# EAGLE board caplocker_tiled (EAGLE 4.16)
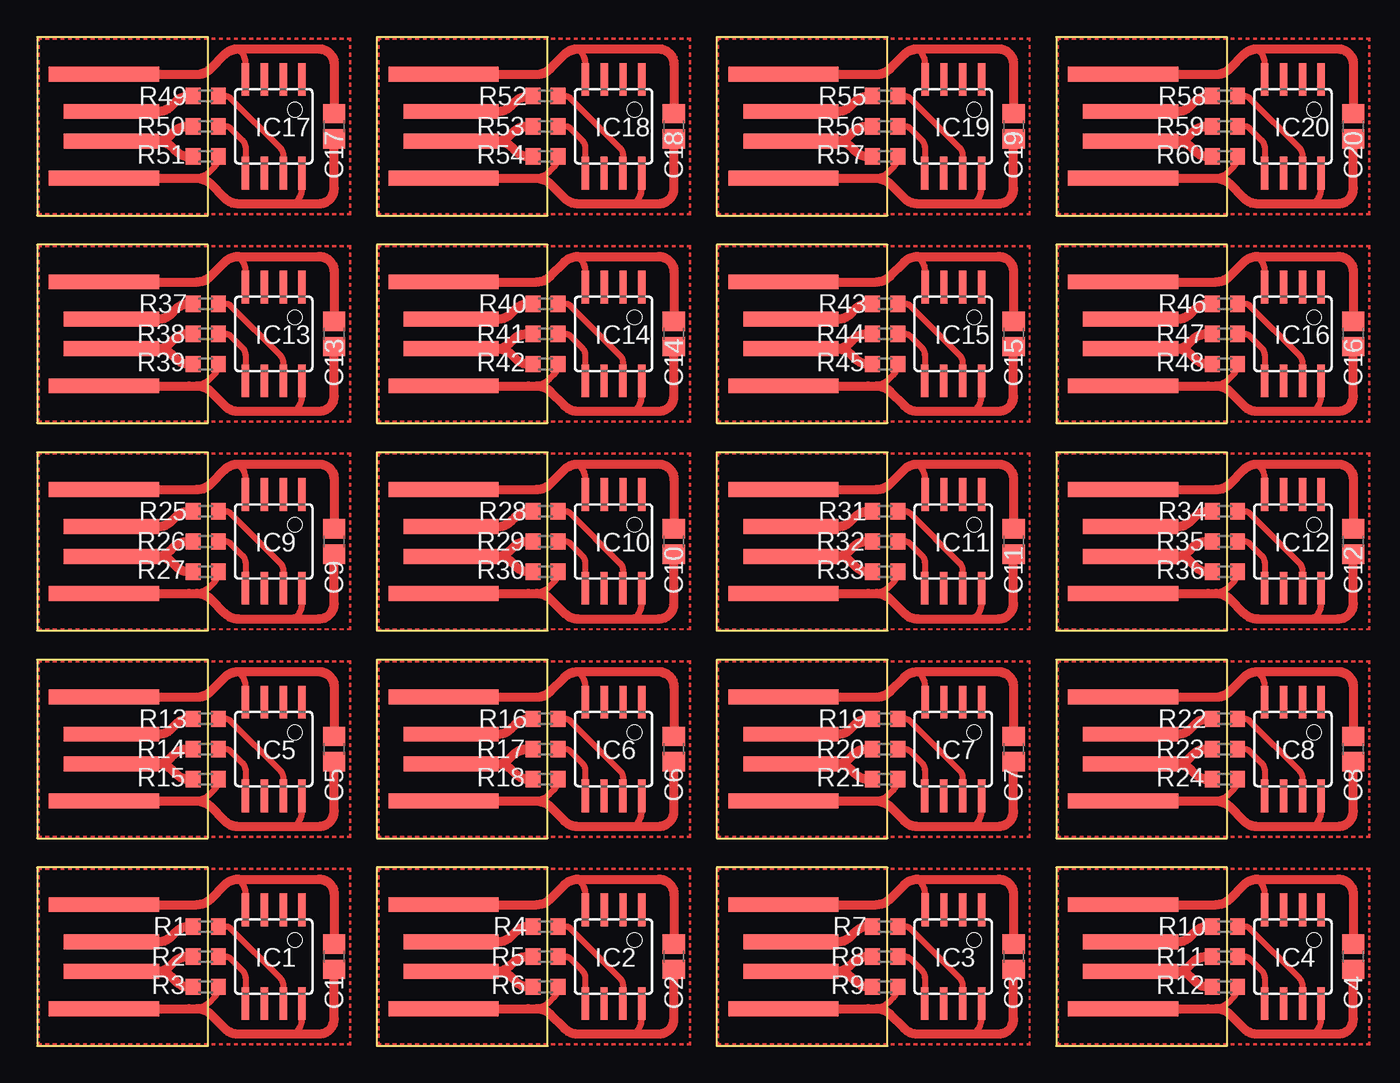
[diagram p0: board, top side]

Size 80.08 x 67.88 mm. Coordinates in mm from the lower left corner, seen from the top.
Copper layers (1*16): Top 0.035mm / dielectric 1.5mm / Bottom 0.035mm
Design rules "default": minimum track width 10mil, minimum drill 24mil, track to track 8mil, track to pad 8mil, pad to pad 8mil, via to via 8mil, smd to smd 8mil, copper to edge 40mil, drill to drill 8mil, minimum pad ring 10mil, minimum via ring 8mil, stop-mask expansion 4mil, vias tented up to drill 0mil, thermal gap 10mil

## Footprints (pad centres in the part's own frame; a part is rotated, then mirrored left to right if it is on the bottom)
C0805 = smd 1.3 x 1.5: 1 -0.85,0; 2 0.85,0
SOIC8 = smd 0.5 x 2.2: 1 -1.905,-3.154; 2 -0.645,-3.154; 3 0.625,-3.154; 4 1.895,-3.154; 5 1.905,3.154; 6 0.635,3.154; 7 -0.635,3.154; 8 -1.905,3.154
R0603 = smd 1 x 1.1: 1 -0.85,0; 2 0.85,0
USB_A_EDGE = smd 6.41 x 1: P$1 0,1; P$2 0,-1 | smd 7.41 x 1: P$3 -0.5,3.5; P$4 -0.5,-3.5

## Placement (x,y rotation side)
C1  0.1  [C0805]  19.99,6 90 top
C2  0.1  [C0805]  42.85,6 90 top
C3  0.1  [C0805]  65.71,6 90 top
C4  0.1  [C0805]  88.57,6 90 top  (outside the outline)
C5  0.1  [C0805]  19.99,19.97 90 top
C6  0.1  [C0805]  42.85,19.97 90 top
C7  0.1  [C0805]  65.71,19.97 90 top
C8  0.1  [C0805]  88.57,19.97 90 top  (outside the outline)
C9  0.1  [C0805]  19.99,33.94 90 top
C10  0.1  [C0805]  42.85,33.94 90 top
C11  0.1  [C0805]  65.71,33.94 90 top
C12  0.1  [C0805]  88.57,33.94 90 top  (outside the outline)
C13  0.1  [C0805]  19.99,47.91 90 top
C14  0.1  [C0805]  42.85,47.91 90 top
C15  0.1  [C0805]  65.71,47.91 90 top
C16  0.1  [C0805]  88.57,47.91 90 top  (outside the outline)
C17  0.1  [C0805]  19.99,61.88 90 top
C18  0.1  [C0805]  42.85,61.88 90 top
C19  0.1  [C0805]  65.71,61.88 90 top
C20  0.1  [C0805]  88.57,61.88 90 top  (outside the outline)
IC1  TINY45  [SOIC8]  15.92,6 180 top
IC2  TINY45  [SOIC8]  38.78,6 180 top
IC3  TINY45  [SOIC8]  61.64,6 180 top
IC4  TINY45  [SOIC8]  84.5,6 180 top
IC5  TINY45  [SOIC8]  15.92,19.97 180 top
IC6  TINY45  [SOIC8]  38.78,19.97 180 top
IC7  TINY45  [SOIC8]  61.64,19.97 180 top
IC8  TINY45  [SOIC8]  84.5,19.97 180 top
IC9  TINY45  [SOIC8]  15.92,33.94 180 top
IC10  TINY45  [SOIC8]  38.78,33.94 180 top
IC11  TINY45  [SOIC8]  61.64,33.94 180 top
IC12  TINY45  [SOIC8]  84.5,33.94 180 top
IC13  TINY45  [SOIC8]  15.92,47.91 180 top
IC14  TINY45  [SOIC8]  38.78,47.91 180 top
IC15  TINY45  [SOIC8]  61.64,47.91 180 top
IC16  TINY45  [SOIC8]  84.5,47.91 180 top
IC17  TINY45  [SOIC8]  15.92,61.88 180 top
IC18  TINY45  [SOIC8]  38.78,61.88 180 top
IC19  TINY45  [SOIC8]  61.64,61.88 180 top
IC20  TINY45  [SOIC8]  84.5,61.88 180 top
R1  68  [R0603]  11.35,8.03 180 top
R2  68  [R0603]  11.35,6 180 top
R3  2K  [R0603]  11.35,3.97 180 top
R4  68  [R0603]  34.21,8.03 180 top
R5  68  [R0603]  34.21,6 180 top
R6  2K  [R0603]  34.21,3.97 180 top
R7  68  [R0603]  57.07,8.03 180 top
R8  68  [R0603]  57.07,6 180 top
R9  2K  [R0603]  57.07,3.97 180 top
R10  68  [R0603]  79.93,8.03 180 top
R11  68  [R0603]  79.93,6 180 top
R12  2K  [R0603]  79.93,3.97 180 top
R13  68  [R0603]  11.35,22 180 top
R14  68  [R0603]  11.35,19.97 180 top
R15  2K  [R0603]  11.35,17.94 180 top
R16  68  [R0603]  34.21,22 180 top
R17  68  [R0603]  34.21,19.97 180 top
R18  2K  [R0603]  34.21,17.94 180 top
R19  68  [R0603]  57.07,22 180 top
R20  68  [R0603]  57.07,19.97 180 top
R21  2K  [R0603]  57.07,17.94 180 top
R22  68  [R0603]  79.93,22 180 top
R23  68  [R0603]  79.93,19.97 180 top
R24  2K  [R0603]  79.93,17.94 180 top
R25  68  [R0603]  11.35,35.97 180 top
R26  68  [R0603]  11.35,33.94 180 top
R27  2K  [R0603]  11.35,31.91 180 top
R28  68  [R0603]  34.21,35.97 180 top
R29  68  [R0603]  34.21,33.94 180 top
R30  2K  [R0603]  34.21,31.91 180 top
R31  68  [R0603]  57.07,35.97 180 top
R32  68  [R0603]  57.07,33.94 180 top
R33  2K  [R0603]  57.07,31.91 180 top
R34  68  [R0603]  79.93,35.97 180 top
R35  68  [R0603]  79.93,33.94 180 top
R36  2K  [R0603]  79.93,31.91 180 top
R37  68  [R0603]  11.35,49.94 180 top
R38  68  [R0603]  11.35,47.91 180 top
R39  2K  [R0603]  11.35,45.88 180 top
R40  68  [R0603]  34.21,49.94 180 top
R41  68  [R0603]  34.21,47.91 180 top
R42  2K  [R0603]  34.21,45.88 180 top
R43  68  [R0603]  57.07,49.94 180 top
R44  68  [R0603]  57.07,47.91 180 top
R45  2K  [R0603]  57.07,45.88 180 top
R46  68  [R0603]  79.93,49.94 180 top
R47  68  [R0603]  79.93,47.91 180 top
R48  2K  [R0603]  79.93,45.88 180 top
R49  68  [R0603]  11.35,63.91 180 top
R50  68  [R0603]  11.35,61.88 180 top
R51  2K  [R0603]  11.35,59.85 180 top
R52  68  [R0603]  34.21,63.91 180 top
R53  68  [R0603]  34.21,61.88 180 top
R54  2K  [R0603]  34.21,59.85 180 top
R55  68  [R0603]  57.07,63.91 180 top
R56  68  [R0603]  57.07,61.88 180 top
R57  2K  [R0603]  57.07,59.85 180 top
R58  68  [R0603]  79.93,63.91 180 top
R59  68  [R0603]  79.93,61.88 180 top
R60  2K  [R0603]  79.93,59.85 180 top
U$1  USB_A_EDGE  [USB_A_EDGE]  5,6 0 top
U$2  USB_A_EDGE  [USB_A_EDGE]  27.86,6 0 top
U$3  USB_A_EDGE  [USB_A_EDGE]  50.72,6 0 top
U$4  USB_A_EDGE  [USB_A_EDGE]  73.58,6 0 top
U$5  USB_A_EDGE  [USB_A_EDGE]  5,19.97 0 top
U$6  USB_A_EDGE  [USB_A_EDGE]  27.86,19.97 0 top
U$7  USB_A_EDGE  [USB_A_EDGE]  50.72,19.97 0 top
U$8  USB_A_EDGE  [USB_A_EDGE]  73.58,19.97 0 top
U$9  USB_A_EDGE  [USB_A_EDGE]  5,33.94 0 top
U$10  USB_A_EDGE  [USB_A_EDGE]  27.86,33.94 0 top
U$11  USB_A_EDGE  [USB_A_EDGE]  50.72,33.94 0 top
U$12  USB_A_EDGE  [USB_A_EDGE]  73.58,33.94 0 top
U$13  USB_A_EDGE  [USB_A_EDGE]  5,47.91 0 top
U$14  USB_A_EDGE  [USB_A_EDGE]  27.86,47.91 0 top
U$15  USB_A_EDGE  [USB_A_EDGE]  50.72,47.91 0 top
U$16  USB_A_EDGE  [USB_A_EDGE]  73.58,47.91 0 top
U$17  USB_A_EDGE  [USB_A_EDGE]  5,61.88 0 top
U$18  USB_A_EDGE  [USB_A_EDGE]  27.86,61.88 0 top
U$19  USB_A_EDGE  [USB_A_EDGE]  50.72,61.88 0 top
U$20  USB_A_EDGE  [USB_A_EDGE]  73.58,61.88 0 top

## Library data of the parts
C1-C20 R1-R60 = rcl
IC1-IC20 = avr-4
U$1-U$20 = macetech

## Nets
GND: C1.2 IC1.4 U$1.P$3
GND1: C2.2 IC2.4 U$2.P$3
GND2: C3.2 IC3.4 U$3.P$3
GND3: C4.2 IC4.4 U$4.P$3
GND4: C5.2 IC5.4 U$5.P$3
GND5: C6.2 IC6.4 U$6.P$3
GND6: C7.2 IC7.4 U$7.P$3
GND7: C8.2 IC8.4 U$8.P$3
GND8: C9.2 IC9.4 U$9.P$3
GND9: C10.2 IC10.4 U$10.P$3
GND10: C11.2 IC11.4 U$11.P$3
GND11: C12.2 IC12.4 U$12.P$3
GND12: C13.2 IC13.4 U$13.P$3
GND13: C14.2 IC14.4 U$14.P$3
GND14: C15.2 IC15.4 U$15.P$3
GND15: C16.2 IC16.4 U$16.P$3
GND16: C17.2 IC17.4 U$17.P$3
GND17: C18.2 IC18.4 U$18.P$3
GND18: C19.2 IC19.4 U$19.P$3
GND19: C20.2 IC20.4 U$20.P$3
N$1: C1.1 IC1.8 R3.1 U$1.P$4
N$2: R1.2 U$1.P$1
N$3: R2.2 R3.2 U$1.P$2
N$4: IC1.7 R1.1
N$5: IC1.5 R2.1
N$6: C2.1 IC2.8 R6.1 U$2.P$4
N$7: R4.2 U$2.P$1
N$8: R5.2 R6.2 U$2.P$2
N$9: IC2.7 R4.1
N$10: IC2.5 R5.1
N$11: C3.1 IC3.8 R9.1 U$3.P$4
N$12: R7.2 U$3.P$1
N$13: R8.2 R9.2 U$3.P$2
N$14: IC3.7 R7.1
N$15: IC3.5 R8.1
N$16: C4.1 IC4.8 R12.1 U$4.P$4
N$17: R10.2 U$4.P$1
N$18: R11.2 R12.2 U$4.P$2
N$19: IC4.7 R10.1
N$20: IC4.5 R11.1
N$21: C5.1 IC5.8 R15.1 U$5.P$4
N$22: R13.2 U$5.P$1
N$23: R14.2 R15.2 U$5.P$2
N$24: IC5.7 R13.1
N$25: IC5.5 R14.1
N$26: C6.1 IC6.8 R18.1 U$6.P$4
N$27: R16.2 U$6.P$1
N$28: R17.2 R18.2 U$6.P$2
N$29: IC6.7 R16.1
N$30: IC6.5 R17.1
N$31: C7.1 IC7.8 R21.1 U$7.P$4
N$32: R19.2 U$7.P$1
N$33: R20.2 R21.2 U$7.P$2
N$34: IC7.7 R19.1
N$35: IC7.5 R20.1
N$36: C8.1 IC8.8 R24.1 U$8.P$4
N$37: R22.2 U$8.P$1
N$38: R23.2 R24.2 U$8.P$2
N$39: IC8.7 R22.1
N$40: IC8.5 R23.1
N$41: C9.1 IC9.8 R27.1 U$9.P$4
N$42: R25.2 U$9.P$1
N$43: R26.2 R27.2 U$9.P$2
N$44: IC9.7 R25.1
N$45: IC9.5 R26.1
N$46: C10.1 IC10.8 R30.1 U$10.P$4
N$47: R28.2 U$10.P$1
N$48: R29.2 R30.2 U$10.P$2
N$49: IC10.7 R28.1
N$50: IC10.5 R29.1
N$51: C11.1 IC11.8 R33.1 U$11.P$4
N$52: R31.2 U$11.P$1
N$53: R32.2 R33.2 U$11.P$2
N$54: IC11.7 R31.1
N$55: IC11.5 R32.1
N$56: C12.1 IC12.8 R36.1 U$12.P$4
N$57: R34.2 U$12.P$1
N$58: R35.2 R36.2 U$12.P$2
N$59: IC12.7 R34.1
N$60: IC12.5 R35.1
N$61: C13.1 IC13.8 R39.1 U$13.P$4
N$62: R37.2 U$13.P$1
N$63: R38.2 R39.2 U$13.P$2
N$64: IC13.7 R37.1
N$65: IC13.5 R38.1
N$66: C14.1 IC14.8 R42.1 U$14.P$4
N$67: R40.2 U$14.P$1
N$68: R41.2 R42.2 U$14.P$2
N$69: IC14.7 R40.1
N$70: IC14.5 R41.1
N$71: C15.1 IC15.8 R45.1 U$15.P$4
N$72: R43.2 U$15.P$1
N$73: R44.2 R45.2 U$15.P$2
N$74: IC15.7 R43.1
N$75: IC15.5 R44.1
N$76: C16.1 IC16.8 R48.1 U$16.P$4
N$77: R46.2 U$16.P$1
N$78: R47.2 R48.2 U$16.P$2
N$79: IC16.7 R46.1
N$80: IC16.5 R47.1
N$81: C17.1 IC17.8 R51.1 U$17.P$4
N$82: R49.2 U$17.P$1
N$83: R50.2 R51.2 U$17.P$2
N$84: IC17.7 R49.1
N$85: IC17.5 R50.1
N$86: C18.1 IC18.8 R54.1 U$18.P$4
N$87: R52.2 U$18.P$1
N$88: R53.2 R54.2 U$18.P$2
N$89: IC18.7 R52.1
N$90: IC18.5 R53.1
N$91: C19.1 IC19.8 R57.1 U$19.P$4
N$92: R55.2 U$19.P$1
N$93: R56.2 R57.2 U$19.P$2
N$94: IC19.7 R55.1
N$95: IC19.5 R56.1
N$96: C20.1 IC20.8 R60.1 U$20.P$4
N$97: R58.2 U$20.P$1
N$98: R59.2 R60.2 U$20.P$2
N$99: IC20.7 R58.1
N$100: IC20.5 R59.1

## Tracks (layer width: path | path; a pad name or v marks a point on that pad's centre or on a via)
GND
  Top 0.406: IC1.4 IC1.4 arc-45 14.02,9.18 14.02,10.19 arc45 13.64,11.09 13.53,11.21
  Top 0.61: U$1.P$3 10.77,9.5 arc45 11.67,9.87 12.63,10.84 arc-45 13.53,11.21 18.97,11.21 arc-90 19.99,10.19 C1.2
GND1
  Top 0.406: IC2.4 IC2.4 arc-45 36.88,9.18 36.88,10.19 arc45 36.5,11.09 36.39,11.21
  Top 0.61: U$2.P$3 33.63,9.5 arc45 34.53,9.87 35.49,10.84 arc-45 36.39,11.21 41.83,11.21 arc-90 42.85,10.19 C2.2
GND2
  Top 0.406: IC3.4 IC3.4 arc-45 59.74,9.18 59.74,10.19 arc45 59.36,11.09 59.25,11.21
  Top 0.61: U$3.P$3 56.49,9.5 arc45 57.39,9.87 58.35,10.84 arc-45 59.25,11.21 64.69,11.21 arc-90 65.71,10.19 C3.2
GND3
  Top 0.406: IC4.4 IC4.4 arc-45 82.6,9.18 82.6,10.19 arc45 82.22,11.09 82.11,11.21
  Top 0.61: U$4.P$3 79.35,9.5 arc45 80.25,9.87 81.21,10.84 arc-45 82.11,11.21 87.55,11.21 arc-90 88.57,10.19 C4.2
GND4
  Top 0.406: IC5.4 IC5.4 arc-45 14.02,23.14 14.02,24.16 arc45 13.64,25.06 13.53,25.18
  Top 0.61: U$5.P$3 10.77,23.47 arc45 11.67,23.84 12.63,24.8 arc-45 13.53,25.18 18.97,25.18 arc-90 19.99,24.16 C5.2
GND5
  Top 0.406: IC6.4 IC6.4 arc-45 36.88,23.14 36.88,24.16 arc45 36.5,25.06 36.39,25.18
  Top 0.61: U$6.P$3 33.63,23.47 arc45 34.53,23.84 35.49,24.8 arc-45 36.39,25.18 41.83,25.18 arc-90 42.85,24.16 C6.2
GND6
  Top 0.406: IC7.4 IC7.4 arc-45 59.74,23.14 59.74,24.16 arc45 59.36,25.06 59.25,25.18
  Top 0.61: U$7.P$3 56.49,23.47 arc45 57.39,23.84 58.35,24.8 arc-45 59.25,25.18 64.69,25.18 arc-90 65.71,24.16 C7.2
GND7
  Top 0.406: IC8.4 IC8.4 arc-45 82.6,23.14 82.6,24.16 arc45 82.22,25.06 82.11,25.18
  Top 0.61: U$8.P$3 79.35,23.47 arc45 80.25,23.84 81.21,24.8 arc-45 82.11,25.18 87.55,25.18 arc-90 88.57,24.16 C8.2
GND8
  Top 0.406: IC9.4 IC9.4 arc-45 14.02,37.12 14.02,38.13 arc45 13.64,39.03 13.53,39.15
  Top 0.61: U$9.P$3 10.77,37.44 arc45 11.67,37.81 12.63,38.77 arc-45 13.53,39.15 18.97,39.15 arc-90 19.99,38.13 C9.2
GND9
  Top 0.406: IC10.4 IC10.4 arc-45 36.88,37.12 36.88,38.13 arc45 36.5,39.03 36.39,39.15
  Top 0.61: U$10.P$3 33.63,37.44 arc45 34.53,37.81 35.49,38.77 arc-45 36.39,39.15 41.83,39.15 arc-90 42.85,38.13 C10.2
GND10
  Top 0.406: IC11.4 IC11.4 arc-45 59.74,37.12 59.74,38.13 arc45 59.36,39.03 59.25,39.15
  Top 0.61: U$11.P$3 56.49,37.44 arc45 57.39,37.81 58.35,38.77 arc-45 59.25,39.15 64.69,39.15 arc-90 65.71,38.13 C11.2
GND11
  Top 0.406: IC12.4 IC12.4 arc-45 82.6,37.12 82.6,38.13 arc45 82.22,39.03 82.11,39.15
  Top 0.61: U$12.P$3 79.35,37.44 arc45 80.25,37.81 81.21,38.77 arc-45 82.11,39.15 87.55,39.15 arc-90 88.57,38.13 C12.2
GND12
  Top 0.406: IC13.4 IC13.4 arc-45 14.02,51.09 14.02,52.1 arc45 13.64,53 13.53,53.12
  Top 0.61: U$13.P$3 10.77,51.41 arc45 11.67,51.78 12.63,52.74 arc-45 13.53,53.12 18.97,53.12 arc-90 19.99,52.1 C13.2
GND13
  Top 0.406: IC14.4 IC14.4 arc-45 36.88,51.09 36.88,52.1 arc45 36.5,53 36.39,53.12
  Top 0.61: U$14.P$3 33.63,51.41 arc45 34.53,51.78 35.49,52.74 arc-45 36.39,53.12 41.83,53.12 arc-90 42.85,52.1 C14.2
GND14
  Top 0.406: IC15.4 IC15.4 arc-45 59.74,51.09 59.74,52.1 arc45 59.36,53 59.25,53.12
  Top 0.61: U$15.P$3 56.49,51.41 arc45 57.39,51.78 58.35,52.74 arc-45 59.25,53.12 64.69,53.12 arc-90 65.71,52.1 C15.2
GND15
  Top 0.406: IC16.4 IC16.4 arc-45 82.6,51.09 82.6,52.1 arc45 82.22,53 82.11,53.12
  Top 0.61: U$16.P$3 79.35,51.41 arc45 80.25,51.78 81.21,52.74 arc-45 82.11,53.12 87.55,53.12 arc-90 88.57,52.1 C16.2
GND16
  Top 0.406: IC17.4 IC17.4 arc-45 14.02,65.06 14.02,66.07 arc45 13.64,66.97 13.53,67.09
  Top 0.61: U$17.P$3 10.77,65.38 arc45 11.67,65.75 12.63,66.72 arc-45 13.53,67.09 18.97,67.09 arc-90 19.99,66.07 C17.2
GND17
  Top 0.406: IC18.4 IC18.4 arc-45 36.88,65.06 36.88,66.07 arc45 36.5,66.97 36.39,67.09
  Top 0.61: U$18.P$3 33.63,65.38 arc45 34.53,65.75 35.49,66.72 arc-45 36.39,67.09 41.83,67.09 arc-90 42.85,66.07 C18.2
GND18
  Top 0.406: IC19.4 IC19.4 arc-45 59.74,65.06 59.74,66.07 arc45 59.36,66.97 59.25,67.09
  Top 0.61: U$19.P$3 56.49,65.38 arc45 57.39,65.75 58.35,66.72 arc-45 59.25,67.09 64.69,67.09 arc-90 65.71,66.07 C19.2
GND19
  Top 0.406: IC20.4 IC20.4 arc-45 82.6,65.06 82.6,66.07 arc45 82.22,66.97 82.11,67.09
  Top 0.61: U$20.P$3 79.35,65.38 arc45 80.25,65.75 81.21,66.72 arc-45 82.11,67.09 87.55,67.09 arc-90 88.57,66.07 C20.2
N$1
  Top 0.406: IC1.8 17.83,1.83 arc-45 17.46,0.93 17.32,0.79 | R3.1 arc-45 11.9,3.25 11.59,2.94 arc-45 10.7,2.57 10.21,2.57 10.21,2.5
  Top 0.61: U$1.P$4 10.21,2.5 10.77,2.5 arc-45 11.67,2.13 12.63,1.16 arc45 13.53,0.79 17.32,0.79 18.97,0.79 arc90 19.99,1.81 C1.1
N$2
  Top 0.61: U$1.P$1 8.14,7 arc45 9.04,7.37 9.33,7.66 arc-45 10.23,8.03 R1.2
N$3
  Top 0.61: U$1.P$2 7.79,5 | 7.79,5 8.05,5 arc45 8.94,5.37 9.2,5.63 arc-45 10.1,6 R2.2 | R3.2 10.23,3.97 arc-45 9.33,4.34 9.05,4.61 arc45 8.16,4.98 7.79,4.98 7.79,5
N$4
  Top 0.406: R1.1 12.69,8.03 arc-45 13,7.9 16.38,4.53 arc-45 16.56,4.09 IC1.7 16.56,2.82
N$5
  Top 0.406: R2.1 12.69,6 arc-45 13,5.87 13.84,5.04 arc-45 14.02,4.6 IC1.5 14.02,2.82
N$6
  Top 0.406: IC2.8 40.69,1.83 arc-45 40.31,0.93 40.18,0.79 | R6.1 arc-45 34.76,3.25 34.45,2.94 arc-45 33.56,2.57 33.07,2.57 33.07,2.5
  Top 0.61: U$2.P$4 33.07,2.5 33.63,2.5 arc-45 34.53,2.13 35.49,1.16 arc45 36.39,0.79 40.18,0.79 41.83,0.79 arc90 42.85,1.81 C2.1
N$7
  Top 0.61: U$2.P$1 31,7 arc45 31.9,7.37 32.19,7.66 arc-45 33.08,8.03 R4.2
N$8
  Top 0.61: U$2.P$2 30.65,5 | 30.65,5 30.91,5 arc45 31.8,5.37 32.06,5.63 arc-45 32.96,6 R5.2 | R6.2 33.08,3.97 arc-45 32.19,4.34 31.91,4.61 arc45 31.02,4.98 30.65,4.98 30.65,5
N$9
  Top 0.406: R4.1 35.55,8.03 arc-45 35.86,7.9 39.24,4.53 arc-45 39.42,4.09 IC2.7 39.42,2.82
N$10
  Top 0.406: R5.1 35.55,6 arc-45 35.86,5.87 36.7,5.04 arc-45 36.88,4.6 IC2.5 36.88,2.82
N$11
  Top 0.406: IC3.8 63.55,1.83 arc-45 63.17,0.93 63.04,0.79 | R9.1 arc-45 57.62,3.25 57.31,2.94 arc-45 56.42,2.57 55.93,2.57 55.93,2.5
  Top 0.61: U$3.P$4 55.93,2.5 56.49,2.5 arc-45 57.39,2.13 58.35,1.16 arc45 59.25,0.79 63.04,0.79 64.69,0.79 arc90 65.71,1.81 C3.1
N$12
  Top 0.61: U$3.P$1 53.86,7 arc45 54.76,7.37 55.05,7.66 arc-45 55.95,8.03 R7.2
N$13
  Top 0.61: U$3.P$2 53.51,5 | 53.51,5 53.77,5 arc45 54.66,5.37 54.92,5.63 arc-45 55.82,6 R8.2 | R9.2 55.95,3.97 arc-45 55.05,4.34 54.77,4.61 arc45 53.88,4.98 53.51,4.98 53.51,5
N$14
  Top 0.406: R7.1 58.41,8.03 arc-45 58.72,7.9 62.1,4.53 arc-45 62.28,4.09 IC3.7 62.28,2.82
N$15
  Top 0.406: R8.1 58.41,6 arc-45 58.72,5.87 59.56,5.04 arc-45 59.74,4.6 IC3.5 59.74,2.82
N$16
  Top 0.406: IC4.8 86.41,1.83 arc-45 86.03,0.93 85.9,0.79 | R12.1 arc-45 80.48,3.25 80.17,2.94 arc-45 79.28,2.57 78.79,2.57 78.79,2.5
  Top 0.61: U$4.P$4 78.79,2.5 79.35,2.5 arc-45 80.25,2.13 81.21,1.16 arc45 82.11,0.79 85.9,0.79 87.55,0.79 arc90 88.57,1.81 C4.1
N$17
  Top 0.61: U$4.P$1 76.72,7 arc45 77.62,7.37 77.91,7.66 arc-45 78.8,8.03 R10.2
N$18
  Top 0.61: U$4.P$2 76.37,5 | 76.37,5 76.63,5 arc45 77.52,5.37 77.78,5.63 arc-45 78.68,6 R11.2 | R12.2 78.8,3.97 arc-45 77.91,4.34 77.63,4.61 arc45 76.74,4.98 76.37,4.98 76.37,5
N$19
  Top 0.406: R10.1 81.27,8.03 arc-45 81.58,7.9 84.96,4.53 arc-45 85.14,4.09 IC4.7 85.14,2.82
N$20
  Top 0.406: R11.1 81.27,6 arc-45 81.58,5.87 82.42,5.04 arc-45 82.6,4.6 IC4.5 82.6,2.82
N$21
  Top 0.406: IC5.8 17.83,15.8 arc-45 17.46,14.9 17.32,14.76 | R15.1 arc-45 11.9,17.22 11.59,16.91 arc-45 10.7,16.54 10.21,16.54 10.21,16.47
  Top 0.61: U$5.P$4 10.21,16.47 10.77,16.47 arc-45 11.67,16.1 12.63,15.13 arc45 13.53,14.76 17.32,14.76 18.97,14.76 arc90 19.99,15.78 C5.1
N$22
  Top 0.61: U$5.P$1 8.14,20.97 arc45 9.04,21.34 9.33,21.63 arc-45 10.23,22 R13.2
N$23
  Top 0.61: U$5.P$2 7.79,18.97 | 7.79,18.97 8.05,18.97 arc45 8.94,19.34 9.2,19.6 arc-45 10.1,19.97 R14.2 | R15.2 10.23,17.94 arc-45 9.33,18.31 9.05,18.58 arc45 8.16,18.95 7.79,18.95 7.79,18.97
N$24
  Top 0.406: R13.1 12.69,22 arc-45 13,21.88 16.38,18.5 arc-45 16.56,18.06 IC5.7 16.56,16.79
N$25
  Top 0.406: R14.1 12.69,19.97 arc-45 13,19.84 13.84,19.01 arc-45 14.02,18.57 IC5.5 14.02,16.79
N$26
  Top 0.406: IC6.8 40.69,15.8 arc-45 40.31,14.9 40.18,14.76 | R18.1 arc-45 34.76,17.22 34.45,16.91 arc-45 33.56,16.54 33.07,16.54 33.07,16.47
  Top 0.61: U$6.P$4 33.07,16.47 33.63,16.47 arc-45 34.53,16.1 35.49,15.13 arc45 36.39,14.76 40.18,14.76 41.83,14.76 arc90 42.85,15.78 C6.1
N$27
  Top 0.61: U$6.P$1 31,20.97 arc45 31.9,21.34 32.19,21.63 arc-45 33.08,22 R16.2
N$28
  Top 0.61: U$6.P$2 30.65,18.97 | 30.65,18.97 30.91,18.97 arc45 31.8,19.34 32.06,19.6 arc-45 32.96,19.97 R17.2 | R18.2 33.08,17.94 arc-45 32.19,18.31 31.91,18.58 arc45 31.02,18.95 30.65,18.95 30.65,18.97
N$29
  Top 0.406: R16.1 35.55,22 arc-45 35.86,21.88 39.24,18.5 arc-45 39.42,18.06 IC6.7 39.42,16.79
N$30
  Top 0.406: R17.1 35.55,19.97 arc-45 35.86,19.84 36.7,19.01 arc-45 36.88,18.57 IC6.5 36.88,16.79
N$31
  Top 0.406: IC7.8 63.55,15.8 arc-45 63.17,14.9 63.04,14.76 | R21.1 arc-45 57.62,17.22 57.31,16.91 arc-45 56.42,16.54 55.93,16.54 55.93,16.47
  Top 0.61: U$7.P$4 55.93,16.47 56.49,16.47 arc-45 57.39,16.1 58.35,15.13 arc45 59.25,14.76 63.04,14.76 64.69,14.76 arc90 65.71,15.78 C7.1
N$32
  Top 0.61: U$7.P$1 53.86,20.97 arc45 54.76,21.34 55.05,21.63 arc-45 55.95,22 R19.2
N$33
  Top 0.61: U$7.P$2 53.51,18.97 | 53.51,18.97 53.77,18.97 arc45 54.66,19.34 54.92,19.6 arc-45 55.82,19.97 R20.2 | R21.2 55.95,17.94 arc-45 55.05,18.31 54.77,18.58 arc45 53.88,18.95 53.51,18.95 53.51,18.97
N$34
  Top 0.406: R19.1 58.41,22 arc-45 58.72,21.88 62.1,18.5 arc-45 62.28,18.06 IC7.7 62.28,16.79
N$35
  Top 0.406: R20.1 58.41,19.97 arc-45 58.72,19.84 59.56,19.01 arc-45 59.74,18.57 IC7.5 59.74,16.79
N$36
  Top 0.406: IC8.8 86.41,15.8 arc-45 86.03,14.9 85.9,14.76 | R24.1 arc-45 80.48,17.22 80.17,16.91 arc-45 79.28,16.54 78.79,16.54 78.79,16.47
  Top 0.61: U$8.P$4 78.79,16.47 79.35,16.47 arc-45 80.25,16.1 81.21,15.13 arc45 82.11,14.76 85.9,14.76 87.55,14.76 arc90 88.57,15.78 C8.1
N$37
  Top 0.61: U$8.P$1 76.72,20.97 arc45 77.62,21.34 77.91,21.63 arc-45 78.8,22 R22.2
N$38
  Top 0.61: U$8.P$2 76.37,18.97 | 76.37,18.97 76.63,18.97 arc45 77.52,19.34 77.78,19.6 arc-45 78.68,19.97 R23.2 | R24.2 78.8,17.94 arc-45 77.91,18.31 77.63,18.58 arc45 76.74,18.95 76.37,18.95 76.37,18.97
N$39
  Top 0.406: R22.1 81.27,22 arc-45 81.58,21.88 84.96,18.5 arc-45 85.14,18.06 IC8.7 85.14,16.79
N$40
  Top 0.406: R23.1 81.27,19.97 arc-45 81.58,19.84 82.42,19.01 arc-45 82.6,18.57 IC8.5 82.6,16.79
N$41
  Top 0.406: IC9.8 17.83,29.77 arc-45 17.46,28.87 17.32,28.73 | R27.1 arc-45 11.9,31.19 11.59,30.88 arc-45 10.7,30.51 10.21,30.51 10.21,30.44
  Top 0.61: U$9.P$4 10.21,30.44 10.77,30.44 arc-45 11.67,30.07 12.63,29.11 arc45 13.53,28.73 17.32,28.73 18.97,28.73 arc90 19.99,29.75 C9.1
N$42
  Top 0.61: U$9.P$1 8.14,34.94 arc45 9.04,35.31 9.33,35.6 arc-45 10.23,35.97 R25.2
N$43
  Top 0.61: U$9.P$2 7.79,32.94 | 7.79,32.94 8.05,32.94 arc45 8.94,33.31 9.2,33.57 arc-45 10.1,33.94 R26.2 | R27.2 10.23,31.91 arc-45 9.33,32.28 9.05,32.55 arc45 8.16,32.92 7.79,32.92 7.79,32.94
N$44
  Top 0.406: R25.1 12.69,35.97 arc-45 13,35.84 16.38,32.47 arc-45 16.56,32.03 IC9.7 16.56,30.77
N$45
  Top 0.406: R26.1 12.69,33.94 arc-45 13,33.81 13.84,32.98 arc-45 14.02,32.54 IC9.5 14.02,30.77
N$46
  Top 0.406: IC10.8 40.69,29.77 arc-45 40.31,28.87 40.18,28.73 | R30.1 arc-45 34.76,31.19 34.45,30.88 arc-45 33.56,30.51 33.07,30.51 33.07,30.44
  Top 0.61: U$10.P$4 33.07,30.44 33.63,30.44 arc-45 34.53,30.07 35.49,29.11 arc45 36.39,28.73 40.18,28.73 41.83,28.73 arc90 42.85,29.75 C10.1
N$47
  Top 0.61: U$10.P$1 31,34.94 arc45 31.9,35.31 32.19,35.6 arc-45 33.08,35.97 R28.2
N$48
  Top 0.61: U$10.P$2 30.65,32.94 | 30.65,32.94 30.91,32.94 arc45 31.8,33.31 32.06,33.57 arc-45 32.96,33.94 R29.2 | R30.2 33.08,31.91 arc-45 32.19,32.28 31.91,32.55 arc45 31.02,32.92 30.65,32.92 30.65,32.94
N$49
  Top 0.406: R28.1 35.55,35.97 arc-45 35.86,35.84 39.24,32.47 arc-45 39.42,32.03 IC10.7 39.42,30.77
N$50
  Top 0.406: R29.1 35.55,33.94 arc-45 35.86,33.81 36.7,32.98 arc-45 36.88,32.54 IC10.5 36.88,30.77
N$51
  Top 0.406: IC11.8 63.55,29.77 arc-45 63.17,28.87 63.04,28.73 | R33.1 arc-45 57.62,31.19 57.31,30.88 arc-45 56.42,30.51 55.93,30.51 55.93,30.44
  Top 0.61: U$11.P$4 55.93,30.44 56.49,30.44 arc-45 57.39,30.07 58.35,29.11 arc45 59.25,28.73 63.04,28.73 64.69,28.73 arc90 65.71,29.75 C11.1
N$52
  Top 0.61: U$11.P$1 53.86,34.94 arc45 54.76,35.31 55.05,35.6 arc-45 55.95,35.97 R31.2
N$53
  Top 0.61: U$11.P$2 53.51,32.94 | 53.51,32.94 53.77,32.94 arc45 54.66,33.31 54.92,33.57 arc-45 55.82,33.94 R32.2 | R33.2 55.95,31.91 arc-45 55.05,32.28 54.77,32.55 arc45 53.88,32.92 53.51,32.92 53.51,32.94
N$54
  Top 0.406: R31.1 58.41,35.97 arc-45 58.72,35.84 62.1,32.47 arc-45 62.28,32.03 IC11.7 62.28,30.77
N$55
  Top 0.406: R32.1 58.41,33.94 arc-45 58.72,33.81 59.56,32.98 arc-45 59.74,32.54 IC11.5 59.74,30.77
N$56
  Top 0.406: IC12.8 86.41,29.77 arc-45 86.03,28.87 85.9,28.73 | R36.1 arc-45 80.48,31.19 80.17,30.88 arc-45 79.28,30.51 78.79,30.51 78.79,30.44
  Top 0.61: U$12.P$4 78.79,30.44 79.35,30.44 arc-45 80.25,30.07 81.21,29.11 arc45 82.11,28.73 85.9,28.73 87.55,28.73 arc90 88.57,29.75 C12.1
N$57
  Top 0.61: U$12.P$1 76.72,34.94 arc45 77.62,35.31 77.91,35.6 arc-45 78.8,35.97 R34.2
N$58
  Top 0.61: U$12.P$2 76.37,32.94 | 76.37,32.94 76.63,32.94 arc45 77.52,33.31 77.78,33.57 arc-45 78.68,33.94 R35.2 | R36.2 78.8,31.91 arc-45 77.91,32.28 77.63,32.55 arc45 76.74,32.92 76.37,32.92 76.37,32.94
N$59
  Top 0.406: R34.1 81.27,35.97 arc-45 81.58,35.84 84.96,32.47 arc-45 85.14,32.03 IC12.7 85.14,30.77
N$60
  Top 0.406: R35.1 81.27,33.94 arc-45 81.58,33.81 82.42,32.98 arc-45 82.6,32.54 IC12.5 82.6,30.77
N$61
  Top 0.406: IC13.8 17.83,43.74 arc-45 17.46,42.84 17.32,42.7 | R39.1 arc-45 11.9,45.16 11.59,44.85 arc-45 10.7,44.48 10.21,44.48 10.21,44.41
  Top 0.61: U$13.P$4 10.21,44.41 10.77,44.41 arc-45 11.67,44.04 12.63,43.07 arc45 13.53,42.7 17.32,42.7 18.97,42.7 arc90 19.99,43.72 C13.1
N$62
  Top 0.61: U$13.P$1 8.14,48.91 arc45 9.04,49.28 9.33,49.57 arc-45 10.23,49.94 R37.2
N$63
  Top 0.61: U$13.P$2 7.79,46.91 | 7.79,46.91 8.05,46.91 arc45 8.94,47.28 9.2,47.54 arc-45 10.1,47.91 R38.2 | R39.2 10.23,45.88 arc-45 9.33,46.25 9.05,46.52 arc45 8.16,46.89 7.79,46.89 7.79,46.91
N$64
  Top 0.406: R37.1 12.69,49.94 arc-45 13,49.81 16.38,46.44 arc-45 16.56,46 IC13.7 16.56,44.73
N$65
  Top 0.406: R38.1 12.69,47.91 arc-45 13,47.78 13.84,46.95 arc-45 14.02,46.51 IC13.5 14.02,44.73
N$66
  Top 0.406: IC14.8 40.69,43.74 arc-45 40.31,42.84 40.18,42.7 | R42.1 arc-45 34.76,45.16 34.45,44.85 arc-45 33.56,44.48 33.07,44.48 33.07,44.41
  Top 0.61: U$14.P$4 33.07,44.41 33.63,44.41 arc-45 34.53,44.04 35.49,43.07 arc45 36.39,42.7 40.18,42.7 41.83,42.7 arc90 42.85,43.72 C14.1
N$67
  Top 0.61: U$14.P$1 31,48.91 arc45 31.9,49.28 32.19,49.57 arc-45 33.08,49.94 R40.2
N$68
  Top 0.61: U$14.P$2 30.65,46.91 | 30.65,46.91 30.91,46.91 arc45 31.8,47.28 32.06,47.54 arc-45 32.96,47.91 R41.2 | R42.2 33.08,45.88 arc-45 32.19,46.25 31.91,46.52 arc45 31.02,46.89 30.65,46.89 30.65,46.91
N$69
  Top 0.406: R40.1 35.55,49.94 arc-45 35.86,49.81 39.24,46.44 arc-45 39.42,46 IC14.7 39.42,44.73
N$70
  Top 0.406: R41.1 35.55,47.91 arc-45 35.86,47.78 36.7,46.95 arc-45 36.88,46.51 IC14.5 36.88,44.73
N$71
  Top 0.406: IC15.8 63.55,43.74 arc-45 63.17,42.84 63.04,42.7 | R45.1 arc-45 57.62,45.16 57.31,44.85 arc-45 56.42,44.48 55.93,44.48 55.93,44.41
  Top 0.61: U$15.P$4 55.93,44.41 56.49,44.41 arc-45 57.39,44.04 58.35,43.07 arc45 59.25,42.7 63.04,42.7 64.69,42.7 arc90 65.71,43.72 C15.1
N$72
  Top 0.61: U$15.P$1 53.86,48.91 arc45 54.76,49.28 55.05,49.57 arc-45 55.95,49.94 R43.2
N$73
  Top 0.61: U$15.P$2 53.51,46.91 | 53.51,46.91 53.77,46.91 arc45 54.66,47.28 54.92,47.54 arc-45 55.82,47.91 R44.2 | R45.2 55.95,45.88 arc-45 55.05,46.25 54.77,46.52 arc45 53.88,46.89 53.51,46.89 53.51,46.91
N$74
  Top 0.406: R43.1 58.41,49.94 arc-45 58.72,49.81 62.1,46.44 arc-45 62.28,46 IC15.7 62.28,44.73
N$75
  Top 0.406: R44.1 58.41,47.91 arc-45 58.72,47.78 59.56,46.95 arc-45 59.74,46.51 IC15.5 59.74,44.73
N$76
  Top 0.406: IC16.8 86.41,43.74 arc-45 86.03,42.84 85.9,42.7 | R48.1 arc-45 80.48,45.16 80.17,44.85 arc-45 79.28,44.48 78.79,44.48 78.79,44.41
  Top 0.61: U$16.P$4 78.79,44.41 79.35,44.41 arc-45 80.25,44.04 81.21,43.07 arc45 82.11,42.7 85.9,42.7 87.55,42.7 arc90 88.57,43.72 C16.1
N$77
  Top 0.61: U$16.P$1 76.72,48.91 arc45 77.62,49.28 77.91,49.57 arc-45 78.8,49.94 R46.2
N$78
  Top 0.61: U$16.P$2 76.37,46.91 | 76.37,46.91 76.63,46.91 arc45 77.52,47.28 77.78,47.54 arc-45 78.68,47.91 R47.2 | R48.2 78.8,45.88 arc-45 77.91,46.25 77.63,46.52 arc45 76.74,46.89 76.37,46.89 76.37,46.91
N$79
  Top 0.406: R46.1 81.27,49.94 arc-45 81.58,49.81 84.96,46.44 arc-45 85.14,46 IC16.7 85.14,44.73
N$80
  Top 0.406: R47.1 81.27,47.91 arc-45 81.58,47.78 82.42,46.95 arc-45 82.6,46.51 IC16.5 82.6,44.73
N$81
  Top 0.406: IC17.8 17.83,57.71 arc-45 17.46,56.81 17.32,56.67 | R51.1 arc-45 11.9,59.13 11.59,58.82 arc-45 10.7,58.45 10.21,58.45 10.21,58.38
  Top 0.61: U$17.P$4 10.21,58.38 10.77,58.38 arc-45 11.67,58.01 12.63,57.05 arc45 13.53,56.67 17.32,56.67 18.97,56.67 arc90 19.99,57.69 C17.1
N$82
  Top 0.61: U$17.P$1 8.14,62.88 arc45 9.04,63.25 9.33,63.54 arc-45 10.23,63.91 R49.2
N$83
  Top 0.61: U$17.P$2 7.79,60.88 | 7.79,60.88 8.05,60.88 arc45 8.94,61.25 9.2,61.51 arc-45 10.1,61.88 R50.2 | R51.2 10.23,59.85 arc-45 9.33,60.22 9.05,60.49 arc45 8.16,60.86 7.79,60.86 7.79,60.88
N$84
  Top 0.406: R49.1 12.69,63.91 arc-45 13,63.78 16.38,60.41 arc-45 16.56,59.98 IC17.7 16.56,58.7
N$85
  Top 0.406: R50.1 12.69,61.88 arc-45 13,61.75 13.84,60.92 arc-45 14.02,60.48 IC17.5 14.02,58.7
N$86
  Top 0.406: IC18.8 40.69,57.71 arc-45 40.31,56.81 40.18,56.67 | R54.1 arc-45 34.76,59.13 34.45,58.82 arc-45 33.56,58.45 33.07,58.45 33.07,58.38
  Top 0.61: U$18.P$4 33.07,58.38 33.63,58.38 arc-45 34.53,58.01 35.49,57.05 arc45 36.39,56.67 40.18,56.67 41.83,56.67 arc90 42.85,57.69 C18.1
N$87
  Top 0.61: U$18.P$1 31,62.88 arc45 31.9,63.25 32.19,63.54 arc-45 33.08,63.91 R52.2
N$88
  Top 0.61: U$18.P$2 30.65,60.88 | 30.65,60.88 30.91,60.88 arc45 31.8,61.25 32.06,61.51 arc-45 32.96,61.88 R53.2 | R54.2 33.08,59.85 arc-45 32.19,60.22 31.91,60.49 arc45 31.02,60.86 30.65,60.86 30.65,60.88
N$89
  Top 0.406: R52.1 35.55,63.91 arc-45 35.86,63.78 39.24,60.41 arc-45 39.42,59.98 IC18.7 39.42,58.7
N$90
  Top 0.406: R53.1 35.55,61.88 arc-45 35.86,61.75 36.7,60.92 arc-45 36.88,60.48 IC18.5 36.88,58.7
N$91
  Top 0.406: IC19.8 63.55,57.71 arc-45 63.17,56.81 63.04,56.67 | R57.1 arc-45 57.62,59.13 57.31,58.82 arc-45 56.42,58.45 55.93,58.45 55.93,58.38
  Top 0.61: U$19.P$4 55.93,58.38 56.49,58.38 arc-45 57.39,58.01 58.35,57.05 arc45 59.25,56.67 63.04,56.67 64.69,56.67 arc90 65.71,57.69 C19.1
N$92
  Top 0.61: U$19.P$1 53.86,62.88 arc45 54.76,63.25 55.05,63.54 arc-45 55.95,63.91 R55.2
N$93
  Top 0.61: U$19.P$2 53.51,60.88 | 53.51,60.88 53.77,60.88 arc45 54.66,61.25 54.92,61.51 arc-45 55.82,61.88 R56.2 | R57.2 55.95,59.85 arc-45 55.05,60.22 54.77,60.49 arc45 53.88,60.86 53.51,60.86 53.51,60.88
N$94
  Top 0.406: R55.1 58.41,63.91 arc-45 58.72,63.78 62.1,60.41 arc-45 62.28,59.98 IC19.7 62.28,58.7
N$95
  Top 0.406: R56.1 58.41,61.88 arc-45 58.72,61.75 59.56,60.92 arc-45 59.74,60.48 IC19.5 59.74,58.7
N$96
  Top 0.406: IC20.8 86.41,57.71 arc-45 86.03,56.81 85.9,56.67 | R60.1 arc-45 80.48,59.13 80.17,58.82 arc-45 79.28,58.45 78.79,58.45 78.79,58.38
  Top 0.61: U$20.P$4 78.79,58.38 79.35,58.38 arc-45 80.25,58.01 81.21,57.05 arc45 82.11,56.67 85.9,56.67 87.55,56.67 arc90 88.57,57.69 C20.1
N$97
  Top 0.61: U$20.P$1 76.72,62.88 arc45 77.62,63.25 77.91,63.54 arc-45 78.8,63.91 R58.2
N$98
  Top 0.61: U$20.P$2 76.37,60.88 | 76.37,60.88 76.63,60.88 arc45 77.52,61.25 77.78,61.51 arc-45 78.68,61.88 R59.2 | R60.2 78.8,59.85 arc-45 77.91,60.22 77.63,60.49 arc45 76.74,60.86 76.37,60.86 76.37,60.88
N$99
  Top 0.406: R58.1 81.27,63.91 arc-45 81.58,63.78 84.96,60.41 arc-45 85.14,59.98 IC20.7 85.14,58.7
N$100
  Top 0.406: R59.1 81.27,61.88 arc-45 81.58,61.75 82.42,60.92 arc-45 82.6,60.48 IC20.5 82.6,58.7
(copper drawn outside any net)
  shapes: Top area x2640